# Altium PCB Safety_rev1.PcbDoc
Units mil, origin at the board's own origin, x right, y up, seen from the top; angles counter-clockwise.
Board outline 2880 x 3030 mil, 2 copper layers (Top Layer, Bottom Layer); 74 components, 37 nets, 238 pads, 54 vias.
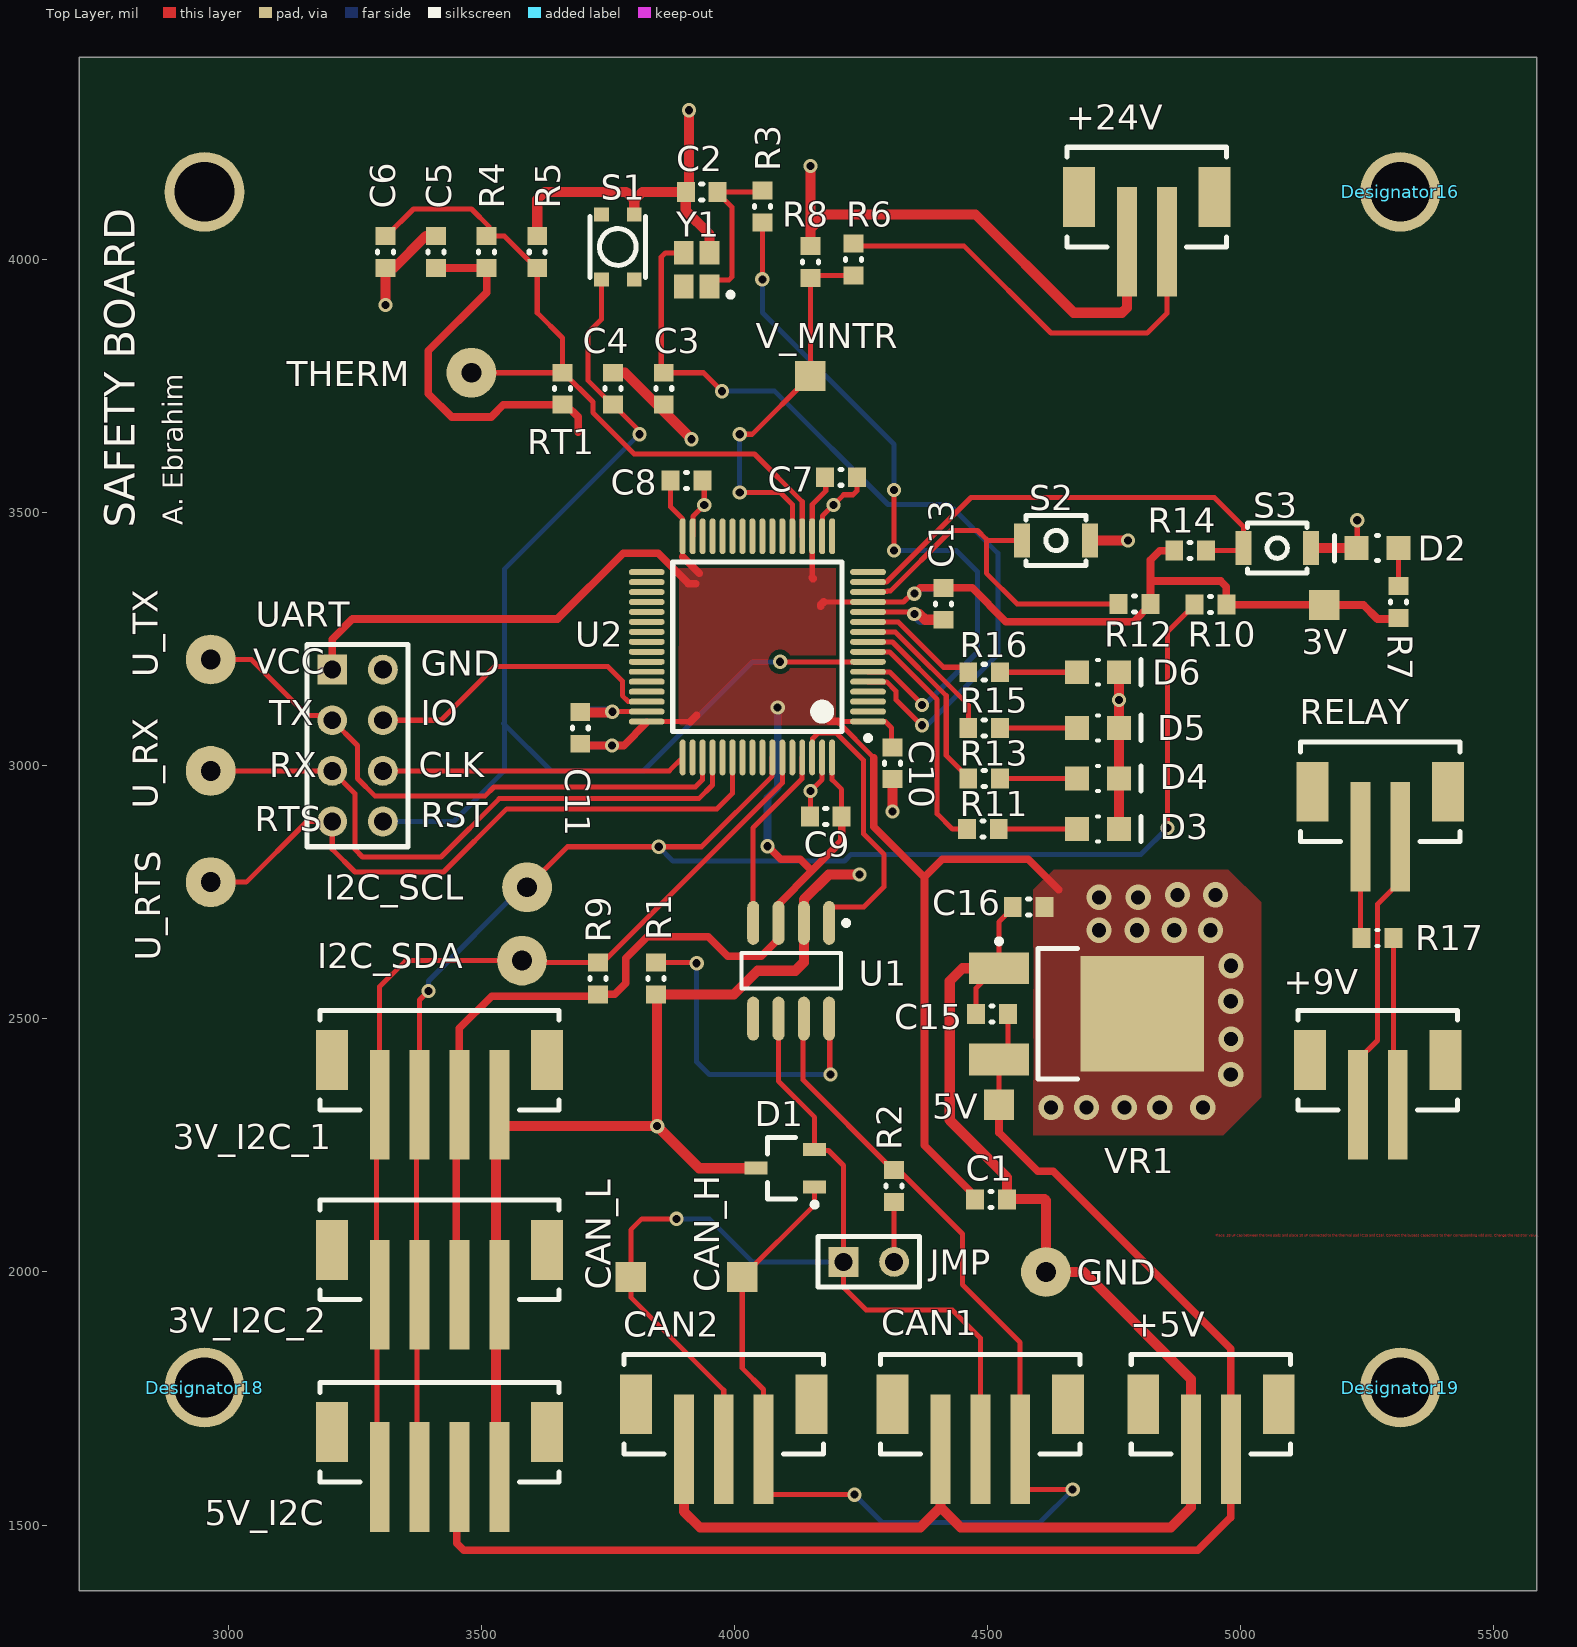
[diagram p0: Top Layer view]
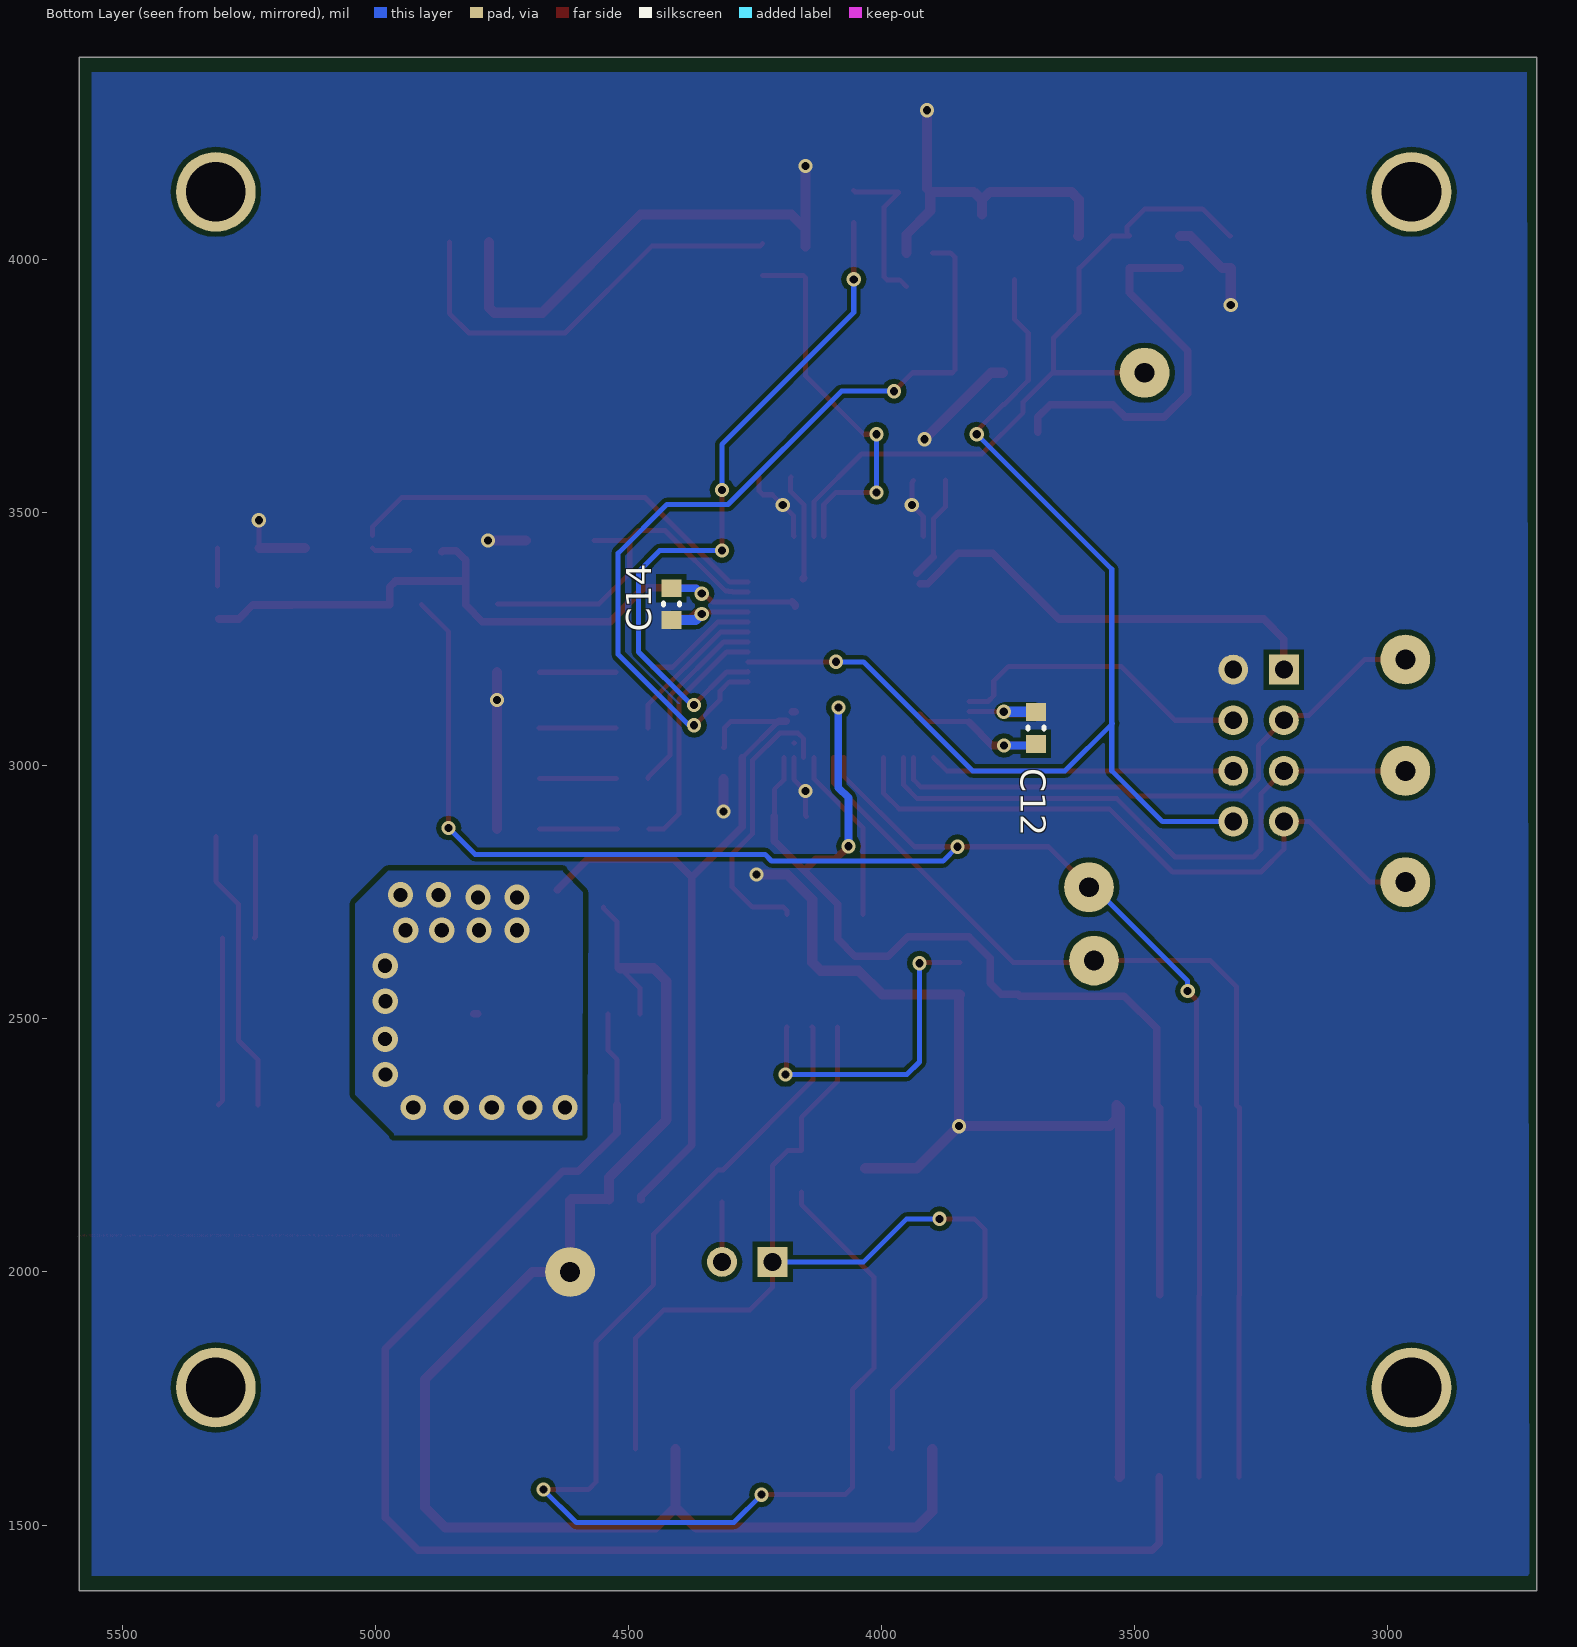
[diagram p1: Bottom Layer view, seen from below]

## Layer stack, top to bottom
Top Solder: solder mask 0.4, Solder Resist, Dk 3.5
Top Layer: signal copper 1.4
Dielectric 1: dielectric 12.6, FR-4, Dk 4.8
Bottom Layer: signal copper 1.4
Bottom Solder: solder mask 0.4, Solder Resist, Dk 3.5

## Board outline
2705,1370 5585,1370 5585,4400 2705,4400

## Design rules (kind name [scope] priority, off if disabled: settings)
Clearance [All] p1: gap=8 ignorepadtopadclearanceinfootprint=FALSE except(0: Arc-Hole Track-Hole SMDPad-Hole THPad-Hole Via-Hole Fill-Hole Poly-Hole Region-Hole Text-Hole; 3: SMDPad-SMDPad SMDPad-THPad THPad-THPad; 5: Text-Text; 10: Arc-Via Track-Via SMDPad-Via SMDPad-Fill SMDPad-Poly SMDPad-Region THPad-Via THPad-Fill THPad-Poly THPad-Region Via-Via Via-Fill Via-Poly Via-Region Fill-Fill Fill-Poly Fill-Region Poly-Poly Poly-Region Region-Region)
HoleSize [All] p1: absolutevalues=TRUE maxlimit=120 minlimit=1 maxpercent=80.000 minpercent=20.000
MinimumSolderMaskSliver [All] p1: minsoldermaskwidth=3
PolygonConnect [All] p1: connectstyle=Direct reliefconductorwidth=10 reliefentries=4 polygonreliefangle="90 Angle" airgapwidth=10
RoutingVias [All] p1: holewidth=28 width=50 viastyle="Through Hole" minholewidth=28 minwidth=50 maxholewidth=28 maxwidth=50
SilkToSilkClearance [All] p1: silktosilkclearance=0.1
SilkToSolderMaskClearance [IsPad] p1: minsilkscreentomaskgap=0.1 clearancetoexposedcopper=TRUE
SolderMaskExpansion [All] p1: expansion=4
Width [All] p1: maxlimit=20 minlimit=8 preferedwidth=10 minimp=50.000000 maximp=50.000000 favimp=50.000000
26 further rules are at their usual default settings.

## Classes and differential pairs
component class Support: D3 D4 D5 D6 I2C_SCL I2C_SDA R9 R10 R11 R12 R13 R14 R15 R16 S2 S3 U_RTS U_RX U_TX UART_RTS UART_RX
component class Power: 3V 5V_TP C15 C16 D2 R6 R7 R8 VR1
component class MCU: C2 C3 C4 C5 C6 C7 C8 C9 C10 C11 C12 C13 C14 GND R3 R4 R5 RT1 S1 THERM U2 V_MNTR Y1
component class Connectors: 3V_I2C_1 5V 5V_I2C +9V +24V CAN1 CAN2 R17 RELAY UART
component class CAN: C1 CAN_H CAN_L D1 JMP R1 R2 U1

## Components (designator, comment, footprint, x,y, rotation, side; value= is the part's Value field where it differs from the comment)
3V "3V_TP" TESTPOINT 5165,3317.72 r90 top (schematic designator TP6)
3V_I2C_1 "CON_4M_PH_TOP_SMT" JST-B4B-SM4-TB 3417,2517.01 r180 top (schematic designator J5)
3V_I2C_2 "CON_4M_PH_TOP_SMT" JST-B4B-SM4-TB 3417,2142.01 r180 top (schematic designator J6)
5V "5V_TP" TESTPOINT 4522.32,2330 r0 top (schematic designator 2)
5V_I2C "CON_4M_PH_TOP_SMT" JST-B4B-SM4-TB 3417,1782.01 r180 top (schematic designator J7)
+5V "PH TOP SMD" JST-B2B-SM4-TB 4941.06,1837.01 r180 top (schematic designator J3)
+9V "PH TOP SMD" JST-B2B-SM4-TB 5270.63,2517.01 r180 top (schematic designator J8)
+24V "PH TOP SMD" JST-B2B-SM4-TB 4814.37,4222.01 r180 top (schematic designator J4)
C1 "CAP_0.1uF_16V_0603" CAPC0603(1608)55_N 4506.5,2143.03 r180 top value=0.1uF
C2 "CAP_15pF_0603" CAPC0603(1608)55_N 3935,4133.86 r0 top value=15pF
C3 "CAP_15pF_0603" CAPC0603(1608)55_N 3860,3745 r90 top value=15pF
C4 "CAP_0.1uF_16V_0603" CAPC0603(1608)55_N 3760,3745 r270 top value=0.1uF
C5 "CAP_1uF_16V_0603" CAPC0603(1608)55_N 3410,4015 r270 top value=1uF
C6 "CAP_10nF_0603" CAPC0603(1608)55_N 3310,4015 r90 top value=10nF
C7 "CAP_0.1uF_16V_0603" CAPC0603(1608)55_N 4210,3570 r180 top value=0.1uF
C8 "CAP_0.1uF_16V_0603" CAPC0603(1608)55_N 3905,3563.5 r180 top value=0.1uF
C9 "CAP_0.1uF_16V_0603" CAPC0603(1608)55_N 4180,2900 r0 top value=0.1uF
C10 "CAP_4.7uF_0603" CAPC0603(1608)55_N 4311.97,3005 r90 top value=4.7uF
C11 "CAP_0.1uF_16V_0603" CAPC0603(1608)55_N 3695,3075 r270 top value=0.1uF
C12 "CAP_0.1uF_16V_0603" CAPC0603(1608)55_N 3695,3074.66 r270 bottom value=0.1uF
C13 "CAP_10nF_0603" CAPC0603(1608)55_N 4412.68,3320 r90 top value=10nF
C14 "CAP_1uF_16V_0603" CAPC0603(1608)55_N 4415,3319.21 r90 bottom value=1uF
C15 "CAP_0.33uF_16V_0603" CAPC0603(1608)55_N 4508.42,2510 r0 top value=0.33uF
C16 "CAP_10uF_0603" CAPC0603(1608)55_N 4580.98,2720.91 r0 top value=10uF
CAN1 "PH TOP SMD" JST-B3B-SM4-TB 4485.43,1837 r180 top (schematic designator J1)
CAN2 "PH TOP SMD" JST-B3B-SM4-TB 3978.46,1837 r180 top (schematic designator J2)
CAN_H "TESTPOINT_SMD" TESTPOINT 4015,1990 r0 top (schematic designator TP1)
CAN_L "TESTPOINT_SMD" TESTPOINT 3795,1990 r90 top (schematic designator TP2)
D1 "TVS_DIODE_CAN" TVS_DIODE_CAN 4100,2205 r180 top
D2 "DIO_LED_R" LED_0805_LINE 5270,3430 r180 top
D3 "DIO_LED_Y" LED_0805_LINE 4718.07,2875 r0 top
D4 "DIO_LED_G" LED_0805_LINE 4718.07,2975 r0 top
D5 "DIO_LED_G" LED_0805_LINE 4718.07,3075 r0 top
D6 "DIO_LED_G" LED_0805_LINE 4718.07,3184.84 r0 top
Designator16 "Comment" MOUNTING_HOLE 5314.96,4133.86 r0 top
Designator18 "Comment" MOUNTING_HOLE 2952.76,1771.65 r0 top
Designator19 "Comment" MOUNTING_HOLE 5314.96,1771.65 r0 top
GND "GND_TP" TESTPOINT_LOOP#1 4615,2000 r0 top (schematic designator TP5)
I2C_SCL "I2C_SCL_TP" TESTPOINT_LOOP#1 3590,2760 r0 top (schematic designator TP8)
I2C_SDA "I2C_SDA_TP" TESTPOINT_LOOP#1 3580,2615 r0 top (schematic designator TP7)
JMP "Header 2" HDR1X2 4215,2020 r0 top (schematic designator 1)
R1 "RES_0R_0603" RESC0603(1608)_N 3845,2580 r270 top value=0R
R2 "RES_120R_0603" RESC0603(1608)_N 4315,2170 r270 top value=120R
R3 "RES_0R_0603" RESC0603(1608)_N 4055,4105 r90 top value=0R
R4 "RES_78K7_0603" RESC0603(1608)_N 3510,4015 r270 top value=78K7
R5 "RES_84K5_0603" RESC0603(1608)_N 3610,4015 r270 top value=84K5
R6 "RES_82K_0603" RESC0603(1608)_N 4235,4000 r90 top value=82K
R7 "RES_100R_0603" RESC0603(1608)_N 5311.34,3323.58 r270 top value=100R
R8 "RES_10.2K_0603" RESC0603(1608)_N 4149.72,3995 r270 top value=10.2K
R9 "RES_4K7_0603" RESC0603(1608)_N 3730,2580 r270 top value=4K7
R10 "RES_4K7_0603" RESC0603(1608)_N 4940,3318.27 r0 top value=4K7
R11 "RES_100R_0603" RESC0603(1608)_N 4490.24,2875 r0 top value=100R
R12 "RES_10K_0603" RESC0603(1608)_N 4790,3320 r0 top value=10K
R13 "RES_100R_0603" RESC0603(1608)_N 4493.07,2975 r0 top value=100R
R14 "RES_10K_0603" RESC0603(1608)_N 4900,3425 r0 top value=10K
R15 "RES_100R_0603" RESC0603(1608)_N 4493.07,3075 r0 top value=100R
R16 "RES_100R_0603" RESC0603(1608)_N 4493.07,3184.84 r0 top value=100R
R17 "RES_750R_0603" RESC0603(1608)_N 5270,2660 r180 top value=750R
RELAY "PH TOP SMD" JST-B2B-SM4-TB 5275.59,3047.01 r180 top (schematic designator J9)
RT1 "NTC_THERM_100K" RESC0603(1608)_N 3660,3745 r90 top value=100K
S1 "SW_PWR" PTS830GM140 3769.21,4025 r270 top
S2 "SW_TACTILE" B3U-1100P 4635,3445 r0 top
S3 "SW_TACTILE" B3U-1100P 5071.93,3430 r0 top
THERM "THERM_TP" TESTPOINT_LOOP#1 3480,3776.5 r0 top (schematic designator TP3)
U1 "IC TXRX CAN" LT-S8_N 4111.69,2595 r270 top
U2 "STM32F091RC" STM_LQFP64_N 4045,3235 r180 top
U_RTS "UART_RTS" TESTPOINT_LOOP#2 2965,2775 r0 top (schematic designator TP9)
U_RX "UART_RX" TESTPOINT_LOOP#2 2960,2990 r90 top (schematic designator TP10)
U_TX "UART_TX" TESTPOINT_LOOP#3 2955,3315 r90 top (schematic designator TP11)
UART "HEADER 4X2" HEADER_2X4 3205,3190 r270 top (schematic designator P1)
V_MNTR "V_MONITOR_TP" TESTPOINT 4149.72,3770 r90 top (schematic designator TP4)
VR1 "5V0_3V3_LDO" VOLTAGE_REGULATOR 4632.17,2510 r270 top
Y1 "CRYSTAL_32MHZ" AVX-CX2520DB32000D0GEJZ1-4_V 3925,3980 r180 top
? "Comment" MOUNTING_HOLE 2952.76,4133.86 r0 top

## Footprints (in the part's own frame and the unit in brackets; to place one, negate y for a bottom-side part, rotate by r counter-clockwise, add the part's x,y. Pads: shape width x height; smd on the part's side, far side on the other; paste and mask are expansions set on the pad)
AVX-CX2520DB32000D0GEJZ1-4_V [mm] "Hand Drawn, 4-Leads,Body 2.5x2mm"
  rect 1x1.2 smd: 1(-0.65,0.85) 2(-0.65,-0.85) 3(0.65,-0.85) 4(0.65,0.85)
  silkscreen extent -1.83,1.13 -1.58,1.38, body extent -1,-1.25 1,1.25, height 0.55
B3U-1100P [mm] "TACTILE SWITCH GREY"
  rect 0.8x1.7 smd: 1(-1.7,0) 2(1.7,0)
  silkscreen extent -1.5,-1.25 1.5,1.25
CAPC0603(1608)55_N [mm] "Chip Capacitor, Body 1.6x0.8mm, Height 0.55mm, IPC Medium Density"
  rect 0.9x1 smd: 1(-0.8,0) 2(0.8,0)
  silkscreen extent -0.05,-0.4 0.05,0.4, body extent -0.87,-0.48 0.88,0.47, height 0.55
HDR1X2 [mm] "Connector; Header; 2 Position"
  rect 1.5x1.5 hole 0.9: 1(0,0)
  round 1.5 hole 0.9: 2(2.54,0)
  silkscreen extent -1.27,-1.27 3.81,1.27
HEADER_2X4 [mm]
  rect 1.5x1.5 hole 0.9: 1(0,0)
  round 1.5 hole 0.9: 2(2.54,0) 3(5.08,0) 4(7.62,0) 5(0,2.54) 6(2.54,2.54) 7(5.08,2.54) 8(7.62,2.54)
  silkscreen extent -1.27,-1.27 8.89,3.81
JST-B2B-SM4-TB [mm]
  rect 1x5.5 smd: 1(-1,4.75) 2(1,4.75)
  rect 1.6x3 smd: 3(-3.4,2.5) 4(3.4,2.5)
  silkscreen extent -4,0 4,5
JST-B3B-SM4-TB [mm]
  rect 1x5.5 smd: 1(-2,4.75) 2(0,4.75) 3(2,4.75)
  rect 1.6x3 smd: 4(-4.4,2.5) 5(4.4,2.5)
  silkscreen extent -5,0 5,5
JST-B4B-SM4-TB [mm]
  rect 1x5.5 smd: 1(-3,4.75) 2(-1,4.75) 3(1,4.75) 4(3,4.75)
  rect 1.6x3 smd: 5(-5.4,2.5) 6(5.4,2.5)
  silkscreen extent -6,0 6,5
LED_0805_LINE [mm] "SMD, 2-Leads, Body 2x1.25mm"
  rect 1.2x1.2 smd: 1(-1.05,0) 2(1.05,0)
  silkscreen extent -0.05,-0.63 2.16,0.64, body extent -1,-0.63 1,0.63, height 0.8
LT-S8_N [mm] "SOP, 8-Leads, Body 4.9x3.9mm, Pitch 1.27mm, IPC Medium Density"
  oval 2.2x0.6 smd: 1(-2.4,1.905) 2(-2.4,0.635) 3(-2.4,-0.635) 4(-2.4,-1.905) 5(2.4,-1.905) 6(2.4,-0.635) 7(2.4,0.635) 8(2.4,1.905)
  silkscreen extent -2.52,-2.5 0.9,2.88, body extent -2,-2.5 2,2.5, height 1.76
MOUNTING_HOLE [mm]
  round 4 hole 3 unplated: 0(0,0)
PTS830GM140 [mm] "PWR TACTILE SWITCH (RED)"
  rect 0.7x0.75 smd: 1(-1.625,0.825) 2(1.625,0.825) 3(-1.625,-0.825) 4(1.625,-0.825)
  silkscreen extent -1.53,-1.4 1.53,1.4
RESC0603(1608)_N [mm] "Chip Resistor, Body 1.6x0.8mm, IPC Medium Density"
  rect 0.9x1 smd: 1(-0.8,0) 2(0.8,0)
  silkscreen extent -0.05,-0.4 0.05,0.4, body extent -0.85,-0.47 0.85,0.47, height 0.6
STM_LQFP64_N [mm] "Thin QFP, 64-Leads, Body 10x10mm, Pitch 0.5mm, IPC Medium Density"
  oval 1.8x0.3 smd mask+0.05: 1(-5.55,3.75) 2(-5.55,3.25) 3(-5.55,2.75) 4(-5.55,2.25) 5(-5.55,1.75) 6(-5.55,1.25) 7(-5.55,0.75) 8(-5.55,0.25) 9(-5.55,-0.25) 10(-5.55,-0.75) 11(-5.55,-1.25) 12(-5.55,-1.75) 13(-5.55,-2.25) 14(-5.55,-2.75) 15(-5.55,-3.25) 16(-5.55,-3.75) 33(5.55,-3.75) 34(5.55,-3.25) 35(5.55,-2.75) 36(5.55,-2.25) 37(5.55,-1.75) 38(5.55,-1.25) 39(5.55,-0.75) 40(5.55,-0.25) 41(5.55,0.25) 42(5.55,0.75) 43(5.55,1.25) 44(5.55,1.75) 45(5.55,2.25) 46(5.55,2.75) 47(5.55,3.25) 48(5.55,3.75)
  oval 0.3x1.8 smd mask+0.05: 17(-3.75,-5.55) 18(-3.25,-5.55) 19(-2.75,-5.55) 20(-2.25,-5.55) 21(-1.75,-5.55) 22(-1.25,-5.55) 23(-0.75,-5.55) 24(-0.25,-5.55) 25(0.25,-5.55) 26(0.75,-5.55) 27(1.25,-5.55) 28(1.75,-5.55) 29(2.25,-5.55) 30(2.75,-5.55) 31(3.25,-5.55) 32(3.75,-5.55) 49(3.75,5.55) 50(3.25,5.55) 51(2.75,5.55) 52(2.25,5.55) 53(1.75,5.55) 54(1.25,5.55) 55(0.75,5.55) 56(0.25,5.55) 57(-0.25,5.55) 58(-0.75,5.55) 59(-1.25,5.55) 60(-1.75,5.55) 61(-2.25,5.55) 62(-2.75,5.55) 63(-3.25,5.55) 64(-3.75,5.55)
  silkscreen extent -5.68,-4.25 4.25,4.7, body extent -5,-5 5,5, height 1.6
TESTPOINT [mil]
  rect 60x60 smd: 1(0,0)
TESTPOINT_LOOP#1 [mm]
  round 2.5 hole 1: 1(0,0)
TESTPOINT_LOOP#2 [mm]
  round 2.5 hole 1: 1(0,-0.127)
TESTPOINT_LOOP#3 [mm]
  round 2.5 hole 1: 1(-2.667,-0.254)
TVS_DIODE_CAN [mm] "SOT23, 3-Leads, Body 2.95x2.80mm, Pitch 0.95mm, IPC Low Density"
  rect 1.15x0.65 smd: 1(-1.475,0.95) 2(-1.475,-0.95) 3(1.475,0)
  silkscreen extent -1.6,-1.55 0.9,1.95, body extent -1.5,-1.55 1.5,1.55, height 1.25
VOLTAGE_REGULATOR [mm] "DPAK, 3-Leads, Body 6.095x6.54mm, Pitch 4.57mm"
  rect 1.6x3 smd: 1(-2.285,-2.79) 3(2.285,-2.79)
  rect 5.8x6.2 smd: 4(0,4.39)
  silkscreen extent -3.76,-2.91 3.27,1.14, body extent -3.27,-0.84 3.27,5.25, height 2.38

## Part data
3V 5V V_MNTR: library part TESTPOINT_SMD
3V_I2C_1 3V_I2C_2 5V_I2C: "CONN HEADER PH TOP 4POS 2MM SMD", Digikey Part Number=455-1736-1-ND, Manufacturer=JST, MPN=B4B-PH-SM4-TB(LF)(SN), ComponentLink1Description=Datasheet, ComponentLink1URL=http://www.jst-mfg.com/product/pdf/eng/ePH.pdf
+5V +9V +24V RELAY: library part CON_2M_PH_TOP_SMT, "CONN HEADER PH TOP 2POS 2MM SMD", Manufacturer=JST, Part Number=B2B-PH-SM4-TB, ComponentLink1Description=Datasheet, ComponentLink1URL=http://www.jst-mfg.com/product/pdf/eng/ePH.pdf
C1 C4 C7 C8 C9 C11 C12: "CAP CER 0.1UF 16V X7R 0603", Manufacturer=Yageo, Package="0603 (1608 Metric)", Part Number=CC0603KRX7R7BB104, Temperature Coefficient=X7R, Voltage Rating=16V, Dimensions="0.063\" L x 0.031\" W (1.60mm x 0.80mm)"
C2 C3: "CAP CER 15PF 250V NPO 0603", Manufacturer=Yageo, Package="0603 (1608 Metric)", Part Number=AC0603JRNPOYBN150, Temperature Coefficient=NP0, Voltage Rating=250v, Dimensions="0.063\" L x 0.031\" W (1.60mm x 0.80mm)"
C5 C14: "CAP CER 1UF 16V Y5V 0603", Manufacturer=Yageo, Package="0603 (1608 Metric)", Part Number=CC0603ZRY5V7BB105, Temperature Coefficient=Y5V, Voltage Rating=16V, Dimensions="0.063\" L x 0.031\" W (1.60mm x 0.80mm)"
C6 C13: "CAP CER 10000PF 16V X7R 0603", Manufacturer=Yageo, Package="0603 (1608 Metric)", Part Number=CC0603KRX7R7BB103, Temperature Coefficient=X7R, Voltage Rating=16V, Dimensions="0.063\" L x 0.031\" W (1.60mm x 0.80mm)"
C10: "CAP CER 4.7UF 6.3V X5R 0603", Manufacturer=Yageo, Package="0603 (1608 Metric)", Part Number=CC0603KRX5R5BB475, Temperature Coefficient=X5R, Voltage Rating=6.3V, Dimensions="0.063\" L x 0.031\" W (1.60mm x 0.80mm)"
C15: "CAP CER 0.33UF 16V X7R 0603", Manufacturer="Murata Electronics North America", Package="0603 (1608 Metric)", Part Number=GRM188R71C334KA01D, Temperature Coefficient=X7R, Voltage Rating=16V, Dimensions="0.063\" L x 0.031\" W (1.60mm x 0.80mm)"
C16: "CAP CER 10UF 10V X5R 0603", Manufacturer=Yageo, Package="0603 (1608 Metric)", Part Number=CC0603MRX5R6BB106, Temperature Coefficient=X5R, Voltage Rating=10V, Dimensions="0.063\" L x 0.031\" W (1.60mm x 0.80mm)"
CAN1 CAN2: library part CON_3M_PH_TOP_SMT, "CONN HEADER PH TOP 3POS 2MM SMD", Manufacturer=JST, Part Number=B3B-PH-SM4-TB, ComponentLink1Description=Datasheet, ComponentLink1URL=http://www.jst-mfg.com/product/pdf/eng/ePH.pdf
D1: "TVS DIODE 24V 41V SOT323-3", Manufacturer="Nexperia USA Inc.", Package="SC-70, SOT-323", Part Number=PESD2CAN,215, ComponentLink1Description=Datasheet, ComponentLink1URL=https://assets.nexperia.com/documents/data-sheet/PESD1CAN-U.pdf
D2: "LED RED DIFFUSED 0805 SMD", Forward Voltage Drop=2V, Manufacturer=OSRAM, Package="0805 (2012 Metric)", Part Number="LS R976-NR-1"
D3: "LED YELLOW DIFFUSED 0805 SMD", Forward Voltage Drop=2.2V, Manufacturer=OSRAM, Package="0805 (2012 Metric)", Part Number="LY R976-PS-36"
D4 D5 D6: "LED GREEN DIFFUSED 0805 SMD", Forward Voltage Drop=2.2V, Manufacturer=OSRAM, Package="0805 (2012 Metric)", Part Number="LG R971-KN-1"
GND I2C_SCL I2C_SDA THERM U_RTS U_RX U_TX: library part TESTPOINT_LOOP
JMP: "Header, 2-Pin", LatestRevisionDate=17-Jul-2002, LatestRevisionNote="Re-released for DXP Platform.", Publisher="Altium Limited"
R1 R3: "RES SMD 0 OHM JUMPER 1/10W 0603", Manufacturer=Yageo, Package="0603 (1608 Metric)", Part Number (MPN)=RC0603JR-070RL, Dimensions="0.063\" L x 0.031\" W (1.60mm x 0.80mm)"
R2: "RES SMD 120 OHM 5% 1/10W 0603", Manufacturer=Yageo, Package="0603 (1608 Metric)", Part Number (MPN)=RC0603JR-07120RL, Tolerance=5%, Dimensions="0.063\" L x 0.031\" W (1.60mm x 0.80mm)"
R4: "RES SMD 78.7K OHM 1% 1/10W 0603", Digikey Part Number=311-78.7KHRCT-ND, Manufacturer=Yageo, Package="0603 (1608 Metric)", Part Number (MPN)=RC0603FR-0778K7L, Tolerance=1%, Dimensions="0.063\" L x 0.031\" W (1.60mm x 0.80mm)"
R5: "RES SMD 84.5K OHM 1% 1/10W 0603", Digikey Part Number=311-84.5KHRCT-ND, Manufacturer=Yageo, Package="0603 (1608 Metric)", Part Number (MPN)=RC0603FR-0784K5L, Tolerance=1%, Dimensions="0.063\" L x 0.031\" W (1.60mm x 0.80mm)"
R6: library part RES_634K_0603, "RES SMD 82K OHM 1% 1/10W 0603", Digikey Part Number=311-634KHRCT-ND, Manufacturer=Yageo, Package="0603 (1608 Metric)", Part Number (MPN)=RC0603FR-07634KL, Tolerance=1%, Dimensions="0.063\" L x 0.031\" W (1.60mm x 0.80mm)"
R7 R11 R13 R15 R16: "RES SMD 100 OHM 1% 1/10W 0603", Manufacturer=Yageo, Package="0603 (1608 Metric)", Part Number (MPN)=RC0603FR-07100RL, Tolerance=1%, Dimensions="0.063\" L x 0.031\" W (1.60mm x 0.80mm)"
R8: library part RES_100K_0603, "RES SMD 10.2K OHM 5% 1/10W 0603", Digikey Part Number=311-261KHRCT-ND, Manufacturer=Yageo, Package="0603 (1608 Metric)", Part Number (MPN)=RC0603FR-07261KL, Tolerance=5%, Dimensions="0.063\" L x 0.031\" W (1.60mm x 0.80mm)"
R9 R10: "RES SMD 4.7K OHM 5% 1/10W 0603", Manufacturer=Yageo, Package="0603 (1608 Metric)", Part Number (MPN)=RC0603JR-074K7L, Tolerance=5%, Dimensions="0.063\" L x 0.031\" W (1.60mm x 0.80mm)"
R12 R14: "RES SMD 10K OHM 5% 1/10W 0603", Manufacturer=Yageo, Package="0603 (1608 Metric)", Part Number (MPN)=RC0603JR-0710KL, Tolerance=5%, Dimensions="0.063\" L x 0.031\" W (1.60mm x 0.80mm)"
R17: "RES SMD 750 OHM 0.5% 1/10W 0603", Digikey Part Number=311-750GRCT-ND, Manufacturer=Yageo, MPN=RC0603JR-07750RL, Package="0603 (1608 Metric)", Tolerance=5%, Dimensions="0.063\" L x 0.031\" W (1.60mm x 0.80mm)"
RT1: "THERM NTC 100KOHM 4700K 0603", Digikey Part Number=P10555CT-ND, Manufacturer=Panasonic, MPN=ERT-J1VV104J
S1: "Power Switch (Red)", Part Number="PTS830GM140 SMTR LFS", ComponentLink1Description=Datasheet, ComponentLink1URL=https://www.ckswitches.com/media/1478/pts830.pdf
S2 S3: "Tactile Switch (Grey)", Digikey Part Number=SW1021TR-ND, Manufacturer Part Number=B3U-1100P
U1: library part LTC2875, "IC TXRX CAN 4MBPS 8SO", Manufacturer="Linear Technologies", Package="8-SOIC (0.154\", 3.90mm Width)", Part Number=LTC2875IS8#PBF, ComponentLink1Description=Datasheet, ComponentLink1URL=https://www.analog.com/media/en/technical-documentation/data-sheets/2875f.pdf
U2: Manufacturer=STMicroelectronics, Package=64-LQFP, ComponentLink1Description=Datasheet, ComponentLink1URL=https://www.st.com/content/ccc/resource/technical/document/datasheet/95/3c/2e/5b/21/09/45/a6/DM00115237.pdf/files/DM00115237.pdf/jcr:content/translations/en.DM00115237.pdf#%5B%7B%22num%22%3A96%2C%22gen%22%3A0%7D%2C%7B%22name%22%3A%22XYZ%22%7D%2C67%2C755%2Cnull%5D, Part Number=STM32F091RC
UART: "Header, 4-Pin Dual row", LatestRevisionDate=17-Jul-2002, LatestRevisionNote="Re-released for DXP Platform.", Publisher="Altium Limited"
VR1: "IC REG LINEAR 3.3V 1A DPAK", Current Output=1A, Manufacturer="ON Semiconductor", Part Number=NCP1117DT33T5G
Y1: "CRYSTAL 32MHZ 8PF SMD", Manufacturer="Kyocera International Inc. Electronic Components", Package="4-SMD, No Lead", Part Number=CX2520DB32000D0GPSC1, Dimensions="0.098\" L x 0.079\" W (2.50mm x 2.00mm)"

## Via types
v1: diameter 28, hole 16, Top Layer to Bottom Layer, 37 vias
v2: diameter 50, hole 28, Top Layer to Bottom Layer, 17 vias

## Nets (pads, with @x,y where several pads share a name; then routed paths per layer and width w, separated by ;. In a path a pad name is that pad's centre, name@x,y a point inside that pad or via, vN(x,y) a via of type N, cw(c..) or ccw(c..) an arc to the next point about the centre after c; other vN are vias at no path point)
+3V3: 3V.1 3V_I2C_1.2 3V_I2C_2.2 C1.2 C5.2 C7.2 C8.2 C9.2 C10.2 C11.2 C12.2 C13.2 C14.2 C16.2 R4.2 R7.2 R9.2 R10.2 R12.2 R14.1 RT1.1 U1.3 U2.1 U2.13 U2.19 U2.32 U2.48 U2.64 UART.1 VR1.4 | length 7477.3
  Top Layer w10: C11.2@3700,3038.5 C11.2@3701.49,3040 ; U2.48 3912.24,3087.36 ; C8.2@3873.5,3565 3873.5,3511.5 3897.36,3487.64 U2.32 3897.36,3412.64 ; 4153.27,3371.45 U2.19 4153.27,3516.3 4180,3543.03 4180,3568.5 C7.2 ; 4175.86,3323.58 U2.13 4333.71,3323.58 4350.13,3340 v1(4355,3340) ; U2.64 4192.64,2972.36 4211.5,2953.5 C9.2 ; 4275,3015.85 4203.49,3087.36 U2.1 4297.64,3087.36 4310,3075 4310,3036.5 C10.2 ; 3V.1@5164.46,3318.27 3V.1 ; R7.2@5309.25,3290 R7.2
  Top Layer w15: UART.1 3205,3250 3245,3290 3650,3290 3780,3420 3848.93,3420 3908.93,3360 3923.5,3360 ; C5.2 R4.2 3510,3935 3395,3820 3395,3735 3440.95,3689.05 3518.78,3689.05 3543.24,3713.5 RT1.1 3666.4,3713.5 3690.86,3689.05 3690.86,3659.14 ; 3V_I2C_2.2@3450,1955 3450,2323.74 3456.26,2330 3456.26,2481.26 3520,2545 3726.5,2545 R9.2 3763.5,2548.5 3785,2570 3785,2620 3827.02,2662.02 3947.98,2662.02 3986.33,2623.67 4052.37,2623.67 4086.69,2657.99 U1.3 4086.69,2726.69 4152.5,2792.5 ; C11.2@3701.49,3040 v1(3758.03,3040) 3780.85,3040 U2.48@3826.5,3085.64 ; 3897.36,3412.64 3930,3380 ; 3912.24,3087.36 3924.88,3100 ; v1(4065,2841.05) 4091.05,2815.01 4129.99,2815.01 4152.5,2792.5 ; 4153.27,3371.45 4154.72,3370 ; 4170,3107.05 4175.67,3107.05 ; 4170,3315 4170,3317.72 4175.86,3323.58 ; 4187.95,3087.72 4203.14,3087.72 4203.49,3087.36 ; C9.2 4211.5,2851.5 4152.5,2792.5 ; 4275,3015.85 4275,2880 4375,2780 ; v1(4355,3340) 4366.5,3351.5 C13.2 4469.1,3351.5 4535.78,3284.81 4788.28,3284.81 4821.5,3318.03 R12.2 4821.5,3365 ; C1.2 4475,2150 4375,2250 4375,2780 ; 4640,2755 4580,2815 4410,2815 4375,2780 ; VR1.4@4797.13,2510 VR1.4 ; R14.1@4868.5,3423.03 4866.54,3425 4840,3425 4821.5,3406.5 4821.5,3365 ; 3V.1@5164.46,3318.27 R10.2 4971.5,3353.5 4960,3365 4821.5,3365 ; 3V.1 5242.28,3317.72 5270,3290 R7.2@5309.25,3290
  Top Layer w20: v2(4868.5,2675) v2@4870.9,2677.4
  Bottom Layer w10: C12.2 C12.2@3698.17,3040
  Bottom Layer w15: C12.2@3698.17,3040 v1(3758.03,3040) ; v1(4065,2841.05) 4065,2936.73 4085,2956.73 v1(4085,3115) ; v1(4355,3340) 4365.71,3350.71 C14.2
  other v2: 4625,2325 4695,2325 4770,2325 4839.84,2325 4925,2325 4980,2390 4980.43,2460 4980,2535 4980.43,2605 4720,2675 4795,2675 4940,2675 4720,2740 4797.13,2740 4875,2745 4950,2745
+5V0: 5V.1 5V_I2C.2 +5V.1 C15.2 VR1.3 | length 2903.1
  Top Layer w10: 5V.1 VR1.3 4539.91,2437.63 C15.2
  Top Layer w15: 5V_I2C.2@3451.26,1595 3451.26,1463.74 3465,1450 4915,1450 4980,1515 4980,1649.57 +5V.1 4980.43,1848.03 4629.8,2198.66 4598.66,2198.66 4522.32,2275 5V.1
+24V0: +24V.1 R6.2 | length 849.2
  Top Layer w10: R6.2 4240,4026.5 4453.5,4026.5 4625,3855 4815,3855 4853.74,3893.74 +24V.1
GND: 3V_I2C_1.1 3V_I2C_2.1 5V_I2C.1 +5V.2 +24V.2 C1.1 C2.1 C3.1 C4.1 C5.1 C6.1 C7.1 C8.1 C9.1 C10.1 C11.1 C12.1 C13.1 C14.1 C15.1 C16.1 CAN1.3 CAN2.3 D1.3 D2.2 D3.2 D4.2 D5.2 D6.2 GND.1 R1.2 R5.1 R8.1 S1.1 S2.2 S3.2 U1.2 U2.12 U2.18 U2.31 U2.47 U2.63 UART.5 VR1.1 Y1.2 | length 8660.4
  Top Layer w10: v1(3758.38,3106.7) 3758.55,3106.87 3826.32,3106.87 U2.47 ; U2.31 3917.39,3453.85 3917.39,3492.39 v1(3940,3515) 3940,3560 C8.1 ; C9.1 4150,2901.5 v1(4150,2950) 4172.61,2972.61 4172.61,3016.15 U2.63 ; U2.63@4172.17,3045 U2.63@4172.61,3045.43 ; U2.18 4173.3,3453.85 4173.3,3493.3 v1(4195,3515) 4215.51,3535.51 4233.97,3535.51 4241.5,3543.03 C7.1 ; U2.12 4351.1,3303.9 v1(4355,3300) v1@4365,3300 ; C15.1 4476.92,2560.75 4516.13,2599.96 VR1.1 4522.32,2691.77 4549.49,2718.94 C16.1 ; D2.2 5230,3431.34 v1(5230,3485)
  Top Layer w20: v1(3310,3910) C6.1 3327.01,3983.5 3390,4046.5 C5.1 ; 5V_I2C.1@3530,1595 3528.74,1596.26 3528.74,2323.74 3535,2330 3535,2302.72 3549.68,2288.03 v1(3846.97,2288.03) ; R5.1@3611.97,4046.5 R5.1 3610,4118.86 3625,4133.86 3785.59,4133.86 3801.69,4117.76 ; C11.1@3700,3101.5 3703.67,3105.17 3756.85,3105.17 v1(3758.38,3106.7) ; C4.1 3783.5,3776.5 v1(3915,3645) ; S1.1 3801.69,4117.76 ; R1.2 R1.2@3846.97,2548.5 ; CAN2.3 3899.72,1526.72 3931.44,1495 4366.69,1495 4406.69,1535 ; v1(3910,4295) 3910,4140.35 C2.1 ; Y1.2 3950.59,4049.41 3903.5,4096.5 C2.1 ; D1.3@4031.93,2205 3930,2205 v1(3846.97,2288.03) ; R8.1 4149.72,4060.79 4150,4061.07 ; v1(4150,4185) 4150,4061.07 ; v1(4246.5,2785) 4185.67,2785 4136.69,2736.02 U1.2 4136.69,2611.69 4120,2595 4045.16,2595 3998.66,2548.5 R1.2@3846.97,2548.5 ; v1(4311.97,2910) C10.1 ; v1@4365,3300 4376.5,3288.5 C13.1 ; CAN1.3 4406.69,1535 ; VR1.1@4516.13,2599.96 4449.96,2599.96 4425,2575 4425,2300 4537.99,2187.01 C1.1 4538.98,2144.02 4612.48,2144.02 4615,2141.5 GND.1 4690,2000 4901.69,1788.31 +5V.2 4901.69,1535 4861.69,1495 4446.69,1495 4406.69,1535 ; S2.2 v1(4776.93,3445) ; D3.2 D4.2 D5.2 v1(4759.41,3129.92) D6.2 ; +24V.2 4775,3905 4765,3895 4670,3895 4476.02,4088.98 4177.91,4088.98 4150,4061.07 ; S3.2 D2.2 ; 3801.69,4117.76 3817.8,4133.86 C2.1 ; v1(3846.97,2288.03) R1.2@3846.97,2548.5
  Bottom Layer w10: C12.1 C12.1@3695.54,3106.7
  Bottom Layer w20: C12.1@3695.54,3106.7 v1(3758.38,3106.7) ; v1(4355,3300) 4367.28,3287.72 C14.1
Net1_1: CAN1.2 CAN2.2 CAN_L.1 D1.2 JMP.1 U1.6 | length 2092.5
  Top Layer w10: v1(3885,2105) 3816.69,2105 3795,2083.31 CAN_L.1 3795,1950 3978.46,1766.54 CAN2.2 CAN2.2@3981.69,1653.22 ; U1.6@4086.69,2483.78 4086.69,2376.91 4158.07,2305.53 D1.2 4158.07,2240.2 4185.27,2240.2 4215,2210.47 JMP.1 4215,1970 4260,1925 4430,1925 4485.43,1869.57 CAN1.2
  Bottom Layer w10: v1(3885,2105) 3950,2105 4035,2020 JMP.1
Net1_2: JMP.2 R2.2 | length 118.5
  Top Layer w10: JMP.2 R2.2
NetC2_2: C2.2 R3.2 Y1.1 | length 321.8
  Top Layer w10: Y1.1 3964.06,3960 3989.14,3960 3995,3965.86 3995,4103.39 3966.5,4131.89 C2.2 4052.36,4133.86 R3.2
NetC3_2: C3.2 U2.5 Y1.3 | length 1646.4
  Top Layer w10: Y1.3 3863.46,4013.46 3855,4005 3855,3781.5 C3.2 3938.5,3776.5 v1(3975,3740) ; U2.5 4263.85,3165.76 4300.43,3165.76 4318.74,3147.45 4318.74,3130.25 4368.99,3080 v1(4370,3080)
  Bottom Layer w10: v1(3975,3740) 4078.99,3740 4302.99,3516 4424,3516 4520,3420 4520,3220 4380,3080 v1(4370,3080)
NetC4_2: C4.2 S1.4 U2.7 UART.8 | length 2265.2
  Top Layer w10: S1.4 3736.73,3881.73 3710,3855 3710,3761.54 3758.03,3713.5 C4.2 3811.77,3661.73 v1(3811.77,3655) ; v1(4090,3205.47) U2.7
  Bottom Layer w10: UART.8 3445,2890 3545,2990 3545,3082.25 ; 3543.62,3083.62 3545,3082.25 ; v1(3811.77,3655) 3545,3388.23 3545,3082.25 ; v1(4090,3205.47) 4035.47,3205.47 3820,2990 3637.25,2990 3545,3082.25
NetC6_2: C6.2 R4.1 R5.2 RT1.2 THERM.1 U2.20 | length 1453.7
  Top Layer w10: C6.2 3311.97,4046.5 3365.47,4100 3480,4100 3515,4065 3515,4051.5 R4.1 3515,4046.5 3545.04,4046.5 3608.03,3983.5 R5.2 3610,3895 3660,3845 RT1.2 THERM.1 ; RT1.2@3661.97,3776.5 3720,3718.46 3720,3697.72 3801.72,3616 4039.46,3616 4133.58,3521.87 U2.20
NetD1_1: CAN1.1 CAN2.1 CAN_H.1 D1.1 R2.1 U1.7 | length 2519.5
  Top Layer w10: U1.7@4136.69,2483.78 4135,2482.09 4135,2379.53 4313.03,2201.5 R2.1 4323.5,2201.5 4450,2075 4450,1975 4564.17,1860.83 CAN1.1 4564.17,1584.68 4578.86,1570 v1(4667.83,1570) ; D1.1@4158.07,2157.6 4158.07,2133.07 CAN_H.1 4015,1810 4057.2,1767.8 CAN2.1 4057.2,1574.68 4071.89,1560 v1(4236.69,1560)
  Bottom Layer w10: v1(4236.69,1560) 4291.69,1505 4602.83,1505 v1(4667.83,1570)
NetD2_1: D2.1 R7.1 | length 74.9
  Top Layer w10: R7.1 D2.1
NetD3_1: D3.1 R11.2 | length 153.7
  Top Layer w10: R11.2 D3.1@4675.39,2875
NetD4_1: D4.1 R13.2 | length 152.2
  Top Layer w10: R13.2@4523.07,2975 D4.1@4675.24,2975
NetD5_1: D5.1 R15.2 | length 152.2
  Top Layer w10: R15.2 D5.1
NetD6_1: D6.1 R16.2 | length 150.8
  Top Layer w10: R16.2 D6.1@4675.39,3184.84
NetJ5_3: 3V_I2C_1.3 3V_I2C_2.3 5V_I2C.3 I2C_SCL.1 R10.1 U2.58 | length 3391.1
  Top Layer w10: 5V_I2C.3@3372.52,1595 3372.52,1953.74 3371.26,1955 3371.26,2323.74 3377.52,2330 3377.52,2537.52 v1(3395,2555) ; I2C_SCL.1 3670,2840 v1(3850,2840) 3934.61,2840 4074.18,2979.57 4074.18,3016.15 U2.58 ; v1(4855,2877.01) 4855,3264.76 R10.1
  Bottom Layer w10: v1(3395,2555) 3395,2574.89 3580,2759.89 I2C_SCL.1@3580,2780 ; v1(3850,2840) 3877.95,2812.05 4216.98,2812.05 4229.93,2825 4802.99,2825 v1(4855,2877.01)
NetJ5_4: 3V_I2C_1.4 3V_I2C_2.4 5V_I2C.4 I2C_SDA.1 R9.1 U2.59 | length 1987.5
  Top Layer w10: 5V_I2C.4@3293.78,1595 3293.78,1953.74 3292.52,1955 3292.52,2323.74 3298.78,2330 3298.78,2563.78 3350,2615 I2C_SDA.1 3583.5,2611.5 R9.1 3740,2611.5 3740,2611.85 4094.21,2966.06 U2.59
NetJ8_1: +9V.1 R17.1 | length 333.5
  Top Layer w10: R17.1 5301.5,2338.5 +9V.1
NetJ8_2: +9V.2 RELAY.1 | length 564.7
  Top Layer w10: +9V.2 5231.26,2418.59 5270,2457.32 5270,2726.45 5314.96,2771.41 RELAY.1
NetJ9_2: R17.2 RELAY.2 | length 200.9
  Top Layer w10: RELAY.2 5236.22,2662.28 R17.2
NetP1_2: U2.51 U_TX.1 UART.2 | length 1178.9
  Top Layer w10: U_TX.1 3045,3210 3155.61,3099.39 3195.61,3099.39 UART.2 3255,3040 3255,2975 3290,2940 3506.42,2940 3524.65,2958.23 3922.17,2958.23 3936.39,2972.45 3936.39,3016.15 U2.51
NetP1_3: U2.52 U_RX.1 UART.3 | length 1259.5
  Top Layer w10: U_RX.1@2965,2950 U_RX.1@2965,2970 ; U_RX.1 UART.3 3250,2945 3250,2835 3265,2820 3420,2820 3535,2935 3929.24,2935 3956.07,2961.83 3956.07,3016.15 U2.52
NetP1_4: U2.54 U_RTS.1 UART.4 | length 1289.4
  Top Layer w10: U_RTS.1 3035,2770 3155,2890 UART.4 3205,2835 3250,2790 3425,2790 3550,2915 3965,2915 3995.79,2945.79 U2.54
NetP1_6: U2.46 UART.6 | length 611.1
  Top Layer w10: UART.6 3419.95,3090 3526.06,3196.11 3749.39,3196.11 3778.06,3167.43 3778.06,3138.59 3789.57,3127.08 3826.15,3127.08 U2.46
NetP1_7: U2.49 UART.7 | length 603.3
  Top Layer w10: UART.7 3870.87,2990 U2.49
NetR1_1: R1.1 U1.8 | length 645.8
  Top Layer w10: R1.1 3923.5,2611.5 v1(3925,2610) ; U1.8@4186.69,2483.78 4187.95,2482.52 4187.95,2391.26 v1(4189.21,2390)
  Bottom Layer w10: v1(3925,2610) 3925,2415 3950,2390 v1(4189.21,2390) v1@4190,2390
NetR3_1: R3.1 U2.6 | length 1385.2
  Top Layer w10: v1(4054.7,3961.02) 4054.7,4073.2 R3.1 ; U2.6 4263.85,3185.44 4306.2,3185.44 4370,3121.64 v1(4370,3120) ; v1(4315,3425) v1(4315,3545)
  Bottom Layer w10: v1(4054.7,3961.02) 4054.7,3895.3 4315,3635 v1(4315,3545) ; v1(4315,3425) 4438.3,3425 4480,3383.3 4480,3225.02 4374.98,3120 v1(4370,3120)
NetR6_1: R6.1 R8.2 U2.21 V_MNTR.1 | length 759.6
  Top Layer w10: v1(4010,3540) 4090,3540 4113.9,3516.1 U2.21 ; v1(4010,3655) 4034.72,3655 V_MNTR.1 R8.2 4154.72,3968.5 R6.1
  Bottom Layer w10: v1(4010,3540) v1(4010,3655)
NetR11_1: R11.1 U2.8 | length 472.7
  Top Layer w10: U2.8 4263.85,3224.81 4306.2,3224.81 4400,3131.01 4400,2905 4430,2875 R11.1
NetR12_1: R12.1 S2.1 U2.14 | length 716.8
  Top Layer w10: U2.14 4293.27,3343.27 4294.05,3344.05 4300.86,3344.05 4301.77,3344.95 4307.54,3344.95 4427.59,3465 4480,3465 4497.24,3447.76 ; S2.1 4500,3445 4497.24,3447.76 ; R12.1 4557.75,3320 4497.24,3380.51 4497.24,3447.76
NetR13_1: R13.1 U2.9 | length 380.1
  Top Layer w10: U2.9 4263.85,3244.5 4311.97,3244.5 4418,3138.47 4418,3020.54 4461.57,2976.97 R13.1
NetR14_2: R14.2 S3.1 U2.15 | length 927.7
  Top Layer w10: U2.15 4300.08,3362.95 4467.13,3530 4947.72,3530 5005,3472.72 S3.1@5005,3455 ; R14.2 5000,3425 S3.1
NetR15_1: R15.1 U2.10 | length 303.1
  Top Layer w10: U2.10 4317.4,3264.53 4461.57,3120.35 R15.1
NetR16_1: R16.1 U2.11 | length 225.3
  Top Layer w10: U2.11 4323.17,3284.21 4412.68,3194.7 4445,3194.7 R16.1@4451.72,3194.7
NetU1_1: U1.1 U2.62 | length 566.7
  Top Layer w10: U2.62@4153.61,3016.93 4153.61,3053.42 4165.12,3064.93 4200.47,3064.93 4254.5,3010.9 4254.5,2865.5 4295,2825 4295,2760.86 4255.05,2720.91 4193.89,2720.91 4186.69,2713.7 U1.1@4186.69,2706.22
NetU1_4: U1.4 U2.61 | length 351
  Top Layer w10: U1.4@4036.69,2706.22 4036,2706.91 4036,2877.01 4133.24,2974.25 4133.24,3016.15 U2.61
pads on no net: 3V_I2C_1.5 3V_I2C_1.6 3V_I2C_2.5 3V_I2C_2.6 5V_I2C.5 5V_I2C.6 +5V.3 +5V.4 +9V.3 +9V.4 +24V.3 +24V.4 ?.0 CAN1.4 CAN1.5 CAN2.4 CAN2.5 Designator16.0 Designator18.0 Designator19.0 RELAY.3 RELAY.4 S1.2 S1.3 U1.5 U2.2 U2.3 U2.4 U2.16 U2.17 U2.22 U2.23 U2.24 U2.25 U2.26 U2.27 U2.28 U2.29 U2.30 U2.33 U2.34 U2.35 U2.36 U2.37 U2.38 U2.39 U2.40 U2.41 U2.42 U2.43 U2.44 U2.45 U2.50 U2.53 U2.55 U2.56 U2.57 U2.60 Y1.4

## Polygon pours and split planes (outlines as drawn)
+3V3 on Top Layer "+3V3_L01_P015" (solid, pour order 15): 4590,2755 4630,2795 4975,2795 5040,2730 5040,2345 4965,2270 4590,2270
no net on Top Layer "Top Layer-No Net" (solid, pour order 11): 4120,3125
no net on Top Layer "Top Layer-No Net 1" (solid, pour order 10): 3965,3155
+3V3 on Top Layer "Top Layer-+3V3" (solid, remove dead copper, pour order 9): 3890.51,3390 4200,3390 4200,3080 3890,3080
GND on Bottom Layer "Bottom Layer-GND" (solid, pour order 14): 2725,4370 5560,4370 5560,1400 2720,1400
+3V3 on Bottom Layer "Bottom Layer-No Net 2" (solid, pour order 8): 4589.7,2750 4630,2790.3 4630,2793.06 4974.62,2793.06 5040,2727.67 5040,2350 4962.78,2272.78 4962.78,2270 4590.9,2270
no net on Bottom Layer "Bottom Layer-No Net" (solid, pour order 13): 2240,2420
no net on Bottom Layer "Bottom Layer-No Net 1" (solid, pour order 12): 5520,1495

## Other copper
Top Layer:
  text "Place .33 uF cap between the two pads and place 10 uF connected to the thermal pad (C15 and C16). Connect the bypass capacitors to their corresponding vdd pins. Change the resistor value." at 4950,2070 h5

## Silkscreen, mask and mechanical layers (free items; w line width, h text height)
Top Overlay:
  text "A. Ebrahim" at 2910,3475 h40 r90
  text "SAFETY BOARD" at 2815,3470 h60 r90

## Text inside footprints (layer, text, board x,y; h text height)
UART: Top Overlay "TX" at 3080.91,3079.76 h50; Top Overlay "RX" at 3080.91,2977.4 h50; Top Overlay "RTS" at 3052.28,2871.1 h50; Top Overlay "IO" at 3380.04,3079.76 h50; Top Overlay "CLK" at 3376.1,2977.4 h50; Top Overlay "RST" at 3380.04,2878.19 h50; Top Overlay "VCC" at 3049.33,3182.13 h50; Top Overlay "GND" at 3380.04,3178.19 h50